# Altium PCB PCB1.PcbDoc
Units mm, origin at the board's own origin, x right, y up, seen from the top; angles counter-clockwise.
Board outline 70 x 50 mm, 2 copper layers (Top Layer, Bottom Layer); 22 components, 20 nets, 77 pads, 0 vias.
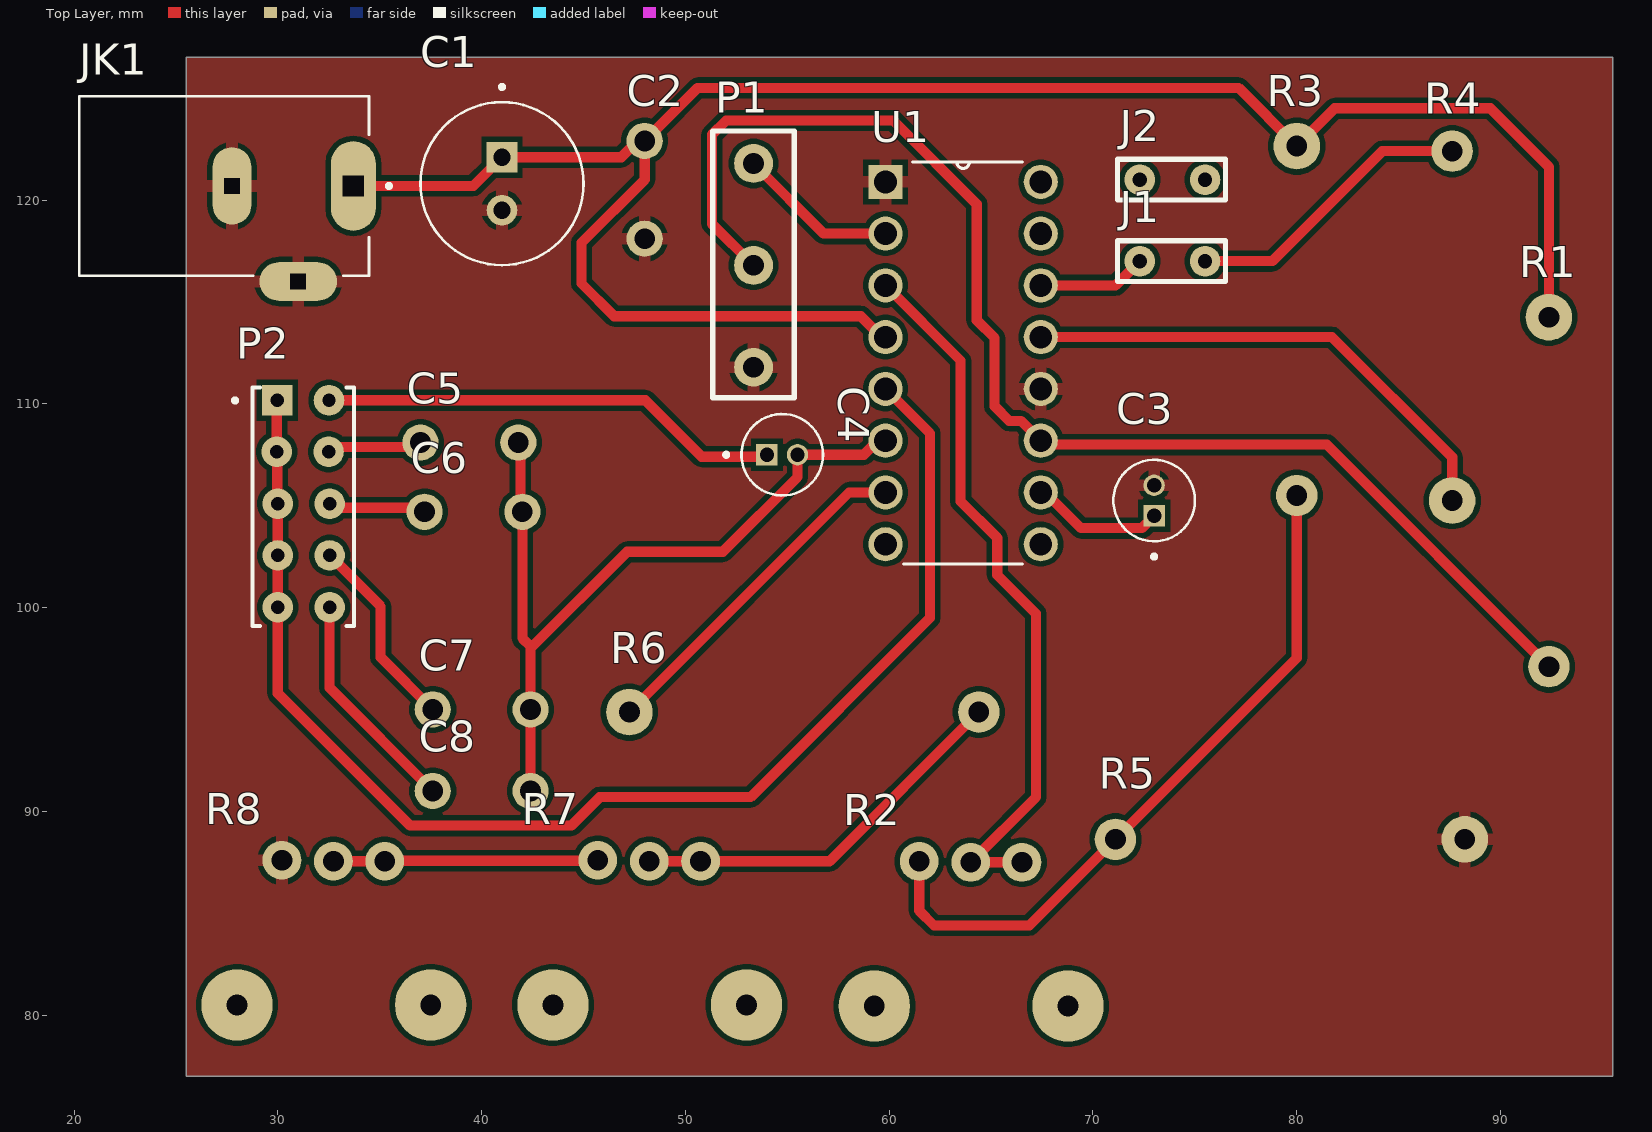
[diagram p0: Top Layer view]
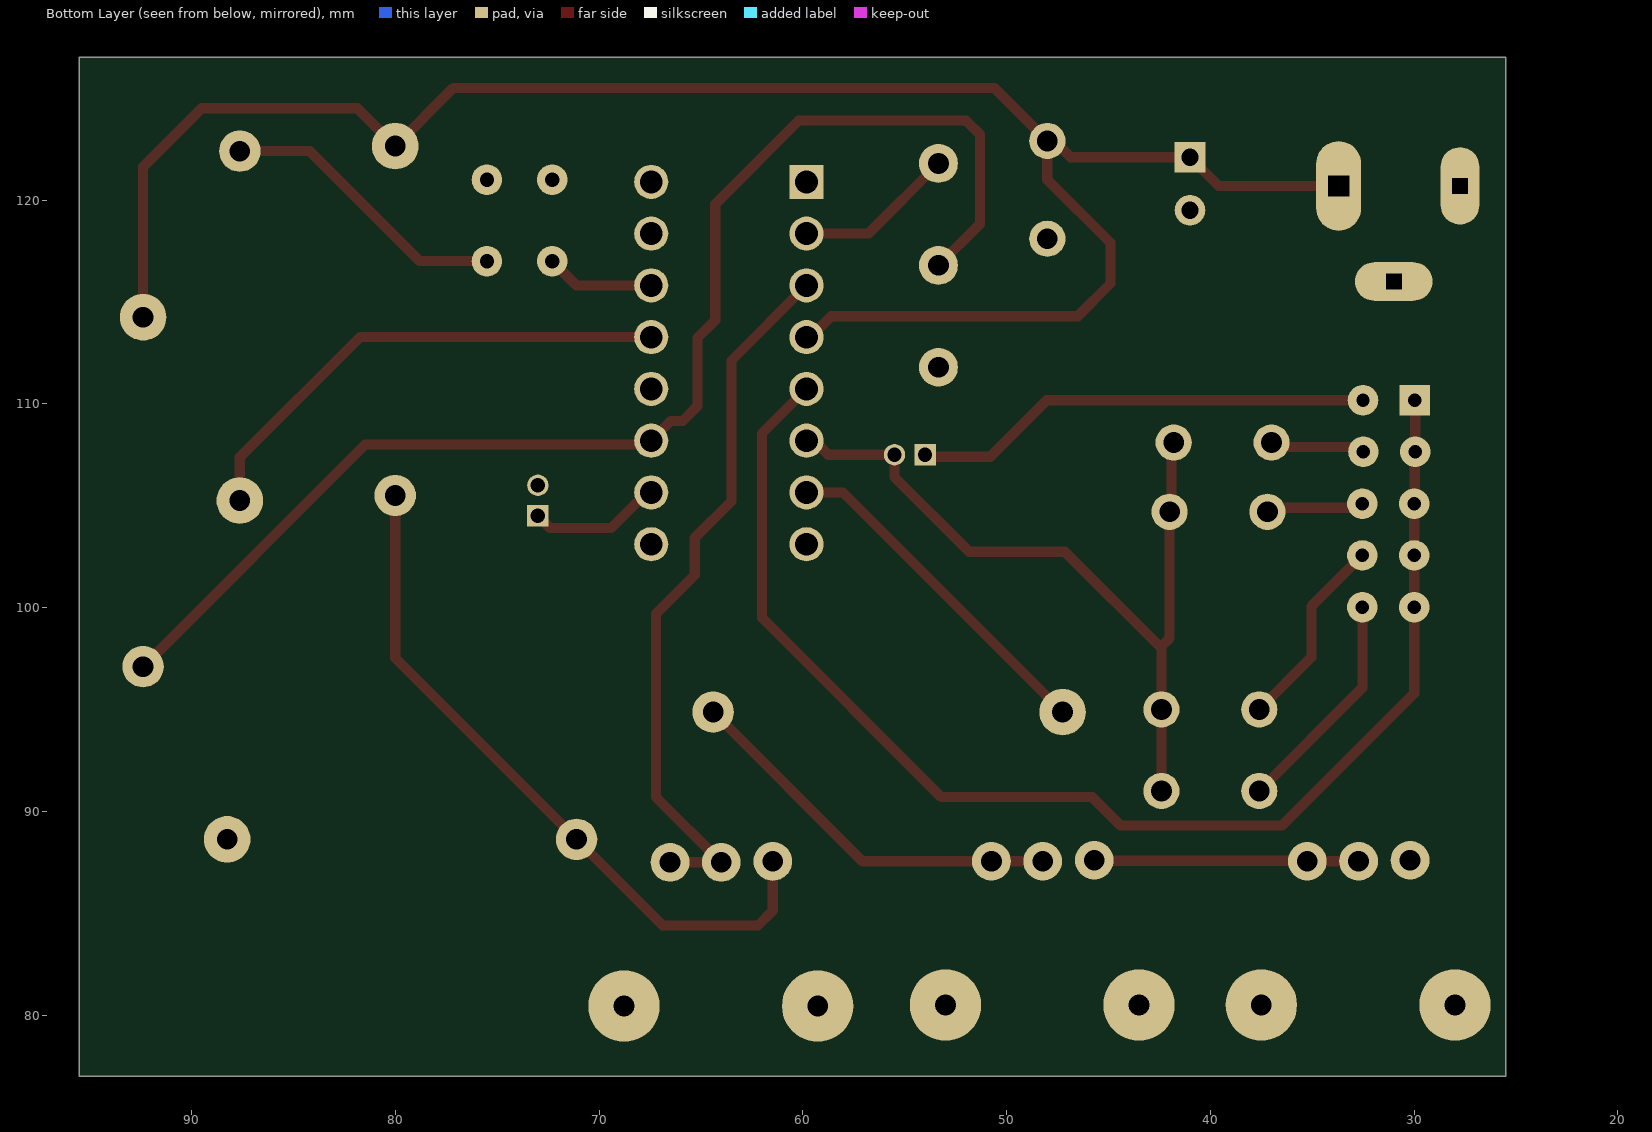
[diagram p1: Bottom Layer view, seen from below]

## Layer stack, top to bottom
Top Solder: solder mask 0.0102, Solder Resist, Dk 3.5
Top Layer: signal copper 0.0356
Dielectric 1: dielectric 0.32, FR-4, Dk 4.8
Bottom Layer: signal copper 0.0356
Bottom Solder: solder mask 0.0102, Solder Resist, Dk 3.5

## Board outline
25.5,77 95.5,77 95.5,127 25.5,127

## Design rules (kind name [scope] priority, off if disabled: settings)
Clearance [All] p1: gap=0.254 ignorepadtopadclearanceinfootprint=FALSE except(0: Arc-Hole Track-Hole SMDPad-Hole THPad-Hole Via-Hole Fill-Hole Poly-Hole Region-Hole Text-Hole)
PolygonConnect [All] p1: connectstyle=Relief reliefconductorwidth=0.6 reliefentries=4 polygonreliefangle="90 Angle" airgapwidth=0.254
RoutingVias [All] p1: holewidth=0.711 width=1.27 viastyle="Through Hole" minholewidth=0.711 minwidth=1.27 maxholewidth=0.711 maxwidth=1.27
SolderMaskExpansion [All] p1: expansion=0.102 istentingtop=FALSE
Width [All] p1: maxlimit=0.5 minlimit=0.254 preferedwidth=0.254 bottomlayer_maxwidth=0.254 minimp=50.000000 maximp=50.000000 favimp=50.000000
30 further rules are at their usual default settings.

## Components (designator, comment, footprint, x,y, rotation, side; value= is the part's Value field where it differs from the comment)
C1 "100uF CAPATICANCE" EEUFR1V101B 41,120.8 r270 top
C2 "0.1uF capaticance" "TH CAPACITOR" 48,120.5 r0 top
C3 "10uF TH CAPACITANCE" "10uf capacitance" 72.9,105.25 r90 top
C4 "10uF TH CAPACITANCE" "10uf capacitance" 54.75,107.6 r0 top
C5 "105 capaticance" "TH CAPACITOR" 39.4,108.1 r270 top
C6 "473 capaticance" "TH CAPACITOR" 39.6,104.7 r270 top
C7 "222 capaticance" "TH CAPACITOR" 40,95 r270 top
C8 "101 capacitance" "TH CAPACITOR" 40,91 r270 top
J1 "JUMPER" JUMPER 75.5,117 r180 top
J2 "JUMPER" JUMPER 75.5,121 r180 top
JK1 "DC Barrek Jack_-" "DC BARREL JACK" 27.75,120.69 r270 top
P1 "1x3 header" "1x3 header - duplicate" 53.341,121.794 r180 top
P2 "2.54mm 2x5 TH Header" "2x5 HEADER" 31.24,108.9 r90 top
R1 "1K TH RESISTOR" "TH RESISTOR" 92.5,106.5 r180 top
R2 "50K POTANTIOMETER" POTANTIOMETER 62.171,71.447 r90 top
R3 "5.1K TH RESISTOR" "TH RESISTOR" 80.127,114.898 r180 top
R4 "330 OHM TH RESISTOR" "TH RESISTOR" 87.5,113 r0 top
R5 "5.1K TH RESISTOR" "TH RESISTOR" 80.5,88.5 r90 top
R6 "5.1K TH RESISTOR" "TH RESISTOR" 55,95 r270 top
R7 "50K POTANTIOMETER" POTANTIOMETER 46.4,71.5 r90 top
R8 "100K POTANTIOMETER" POTANTIOMETER 30.9,71.5 r90 top
U1 "XR2206" XR2206 63.5,112 r0 top

## Footprints (in the part's own frame and the unit in brackets; to place one, negate y for a bottom-side part, rotate by r counter-clockwise, add the part's x,y. Pads: shape width x height; smd on the part's side, far side on the other; paste and mask are expansions set on the pad)
"1x3 header - duplicate" [mil]
  round 75 hole 40 mask+1.97: 1(0,0) 2(0,196.85) 3(0,393.7)
  silkscreen extent -79,-63 79,453
"2x5 HEADER" [mm]
  rect 1.5x1.5 hole 0.66: 1(1.27,1.27)
  round 1.5 hole 0.66: 2(-1.25,1.29) 3(-3.8,1.24) 4(-6.34,1.24) 5(1.27,-1.27) 6(-1.25,-1.25) 7(-3.8,-1.3) 8(-6.34,-1.3) 9(-8.88,1.24) 10(-8.88,-1.3)
  silkscreen extent -9.8,-2.49 1.91,3.44, body extent -10.15,-2.5 2.55,2.58, height 9.5
"10uf capacitance" [mm]
  rect 1.05x1.05 hole 0.7: 1(-0.75,-0.1)
  round 1.05 hole 0.7: 2(0.75,-0.1)
  silkscreen extent -2.85,-2.1 2,1.9, body extent -2,-2.1 2,1.9, height 7
"DC BARREL JACK" [mm]
  oval 4.4x2.2 hole 1.02 square: 1(0,5.955)
  oval 3.8x1.9 hole 0.76 square: 2(0,0)
  oval 1.9x3.8 hole 0.76 square: 3(4.69,3.25)
  silkscreen extent -4.4,-7.49 4.4,7.8, body extent -4.4,-7.77 5.15,6.65, height 11.34
EEUFR1V101B [mm] "100uF CAPATAICANCE"
  rect 1.5x1.5 hole 0.85: 1(-1.3,0)
  round 1.5 hole 0.85: 2(1.3,0)
  silkscreen extent -4.85,-4 4,4, body extent -4,-4 4,4, height 11.5
JUMPER [mm]
  round 1.5 hole 0.7 mask+0.05: 1(0,0) 2(3.2,0)
  silkscreen extent -1,-1 4.3,1
POTANTIOMETER [mm]
  round 1.905 hole 1.016 mask+0.05: 1(16.1,0.7) 2(16.053,-1.829) 3(16.053,-4.343)
  round 3.5 hole 1.016 mask+0.05: ""(9,-6.6) ""(9,2.9)
  body extent 3.65,-6.68 16.2,3.07, height 19.78
"TH CAPACITOR" [mil]
  round 70 hole 40 mask+1.97: 1(0,94.49) 2(0,-94.49)
  body extent -45,-110 45,110, height 250
"TH RESISTOR" [mil]
  round 90 hole 40 mask+1.97: 1(5,-305)
  round 80 hole 40 mask+1.97: 2(5,370)
  body extent -59,-311 73,390, height 142
XR2206 [mil]
  rect 66x66 hole 44: 1(-145,350)
  round 66 hole 44: 2(-145,250) 3(-145,150) 4(-145,50) 5(-145,-50) 6(-145,-150) 7(-145,-250) 8(-145,-350) 9(155,-350) 10(155,-250) 11(155,-150) 12(155,-50) 13(155,50) 14(155,150) 15(155,250) 16(155,350)
  silkscreen extent -110,-388 120,388, body extent -150,-396 160,396, height 210

## Part data
JK1: "Power Barrel Connector Jack 2.10mm ID _0.083_, 5.50mm OD _0.217_ Through Hole, Right Angle", Package="Non-Standard MPD", Availability=Unavailable, MF=MPD, MP=EJ508A, Price=None, SnapEDA_Link=https://www.snapeda.com/parts/EJ508A/MPD%20%28Memory%20Protection%20Devices%29/view-part/474399/?ref=snap
P2: "2.54mm 2X3 TH Header"
R8: library part "100K POTANTIMETER"

## Nets (pads, with @x,y where several pads share a name; then routed paths per layer and width w, separated by ;. In a path a pad name is that pad's centre, name@x,y a point inside that pad or via, vN(x,y) a via of type N, cw(c..) or ccw(c..) an arc to the next point about the centre after c; other vN are vias at no path point)
GND: C1.2 C2.2 C3.2 JK1.2 JK1.3 P1.3 R5.1 R8.1 U1.1 U1.12
NetC3_1: C3.1 U1.10 | length 6.5
  Top Layer w0.5: U1.10 67.66,105.65 69.41,103.9 72.4,103.9 C3.1
NetC4_1: C4.1 P2.5 | length 22.7
  Top Layer w0.5: P2.5 48.03,110.17 50.8,107.4 53.9,107.4 C4.1
NetC4_2: C4.2 C5.1 C6.1 C7.1 C8.1 U1.6 | length 39.6
  Top Layer w0.5: C5.1 41.9,108 41.9,104.8 C6.1 42,98.5 42.4,98.1 42.4,98 ; C8.1 C7.1 42.4,98 ; U1.6 59.445,108.19 58.755,107.5 C4.2 55.5,106.4 51.839,102.739 47.139,102.739 42.4,98
NetC5_2: C5.2 P2.6 | length 4.7
  Top Layer w0.5: P2.6 32.715,107.875 36.775,107.875 C5.2
NetC6_2: C6.2 P2.7 | length 4.8
  Top Layer w0.5: P2.7 32.74,104.9 37,104.9 C6.2
NetC7_2: C7.2 P2.8 | length 9.7
  Top Layer w0.5: P2.8 35.043,100.057 35.043,97.557 C7.2
NetC8_2: C8.2 P2.10 | length 11.1
  Top Layer w0.5: P2.10 32.54,96.06 C8.2
NetJ1_1: J1.1 R4.2 | length 14.4
  Top Layer w0.5: J1.1 78.792,117 84.191,122.398 R4.2
NetJ1_2: J1.2 U1.14 | length 5.4
  Top Layer w0.5: U1.14 71.111,115.81 J1.2
NetP1_1: P1.1 U1.2 | length 7.9
  Top Layer w0.5: P1.1 56.785,118.35 U1.2
NetP1_2: P1.2 R1.2 U1.11 | length 64.8
  Top Layer w0.5: P1.2 51.3,118.835 51.3,123.2 52,123.9 60.2,123.9 64.3,119.8 64.3,114.1 65.172,113.228 65.172,109.873 65.881,109.163 66.464,109.163 U1.11 ; U1.11@67.627,108 81.475,108 R1.2
NetP2_1: P2.1 P2.2 P2.3 P2.4 P2.9 U1.5 | length 65.5
  Top Layer w0.5: P2.1 29.95,110.15 P2.2 29.975,107.625 29.975,105.125 P2.3 P2.4 P2.9 30,95.8 36.5,89.3 44.4,89.3 45.8,90.7 53.2,90.7 62,99.5 62,108.547 U1.5
NetR2_1: R2.1 R3.2 R5.2 | length 34.7
  Top Layer w0.5: R2.1 61.471,85.129 62.2,84.4 66.875,84.4 R5.2 80,97.525 R3.2
NetR2_2: R2.2 R2.3 U1.3 | length 35.2
  Top Layer w0.5: U1.3 63.5,112.127 63.5,105.22 65.3,103.42 65.3,101.6 67.2,99.7 67.2,90.7 R2.2 R2.3
NetR4_1: R4.1 U1.13 | length 24.8
  Top Layer w0.5: U1.13 81.73,113.27 87.627,107.373 R4.1
NetR6_1: R6.1 U1.7 | length 17
  Top Layer w0.5: R6.1 58.03,105.65 U1.7
NetR6_2: R6.2 R7.2 R7.3 | length 19.2
  Top Layer w0.5: R7.2 R7.3 57.078,87.553 R6.2
NetR7_1: R7.1 R8.2 R8.3 | length 13
  Top Layer w0.5: R8.2 R8.3 35.267,87.576 45.676,87.576 R7.1
VCC: C1.1 C2.1 JK1.1 R1.1 R3.1 U1.4 | length 95.5
  Top Layer w0.5: JK1.1 39.59,120.69 C1.1 46.854,122.1 47.654,122.9 C2.1 ; U1.4 59.631,113.27 58.601,114.3 46.5,114.3 44.9,115.9 44.9,117.9 48,121 C2.1 ; R1.1 92.373,121.627 89.5,124.5 81.855,124.5 R3.1 77.145,125.5 50.6,125.5 C2.1
pads on no net: J2.1 J2.2 R2. R7. R8. U1.8 U1.9 U1.15 U1.16

## Polygon pours and split planes (outlines as drawn)
GND on Top Layer "GND_L01_P000" (solid, pour order 0): 25.5,127 95.5,127 95.5,77 25.5,77